# Altium PCB CMT4531_V1.0.pcbdoc
Units mil, origin at the board's own origin, x right, y up, seen from the top; angles counter-clockwise.
Board outline 629.9 x 984.3 mil, 2 copper layers (Top Layer, Bottom Layer), stack 12.8 mil thick; 28 components, 33 nets, 106 pads, 82 vias.
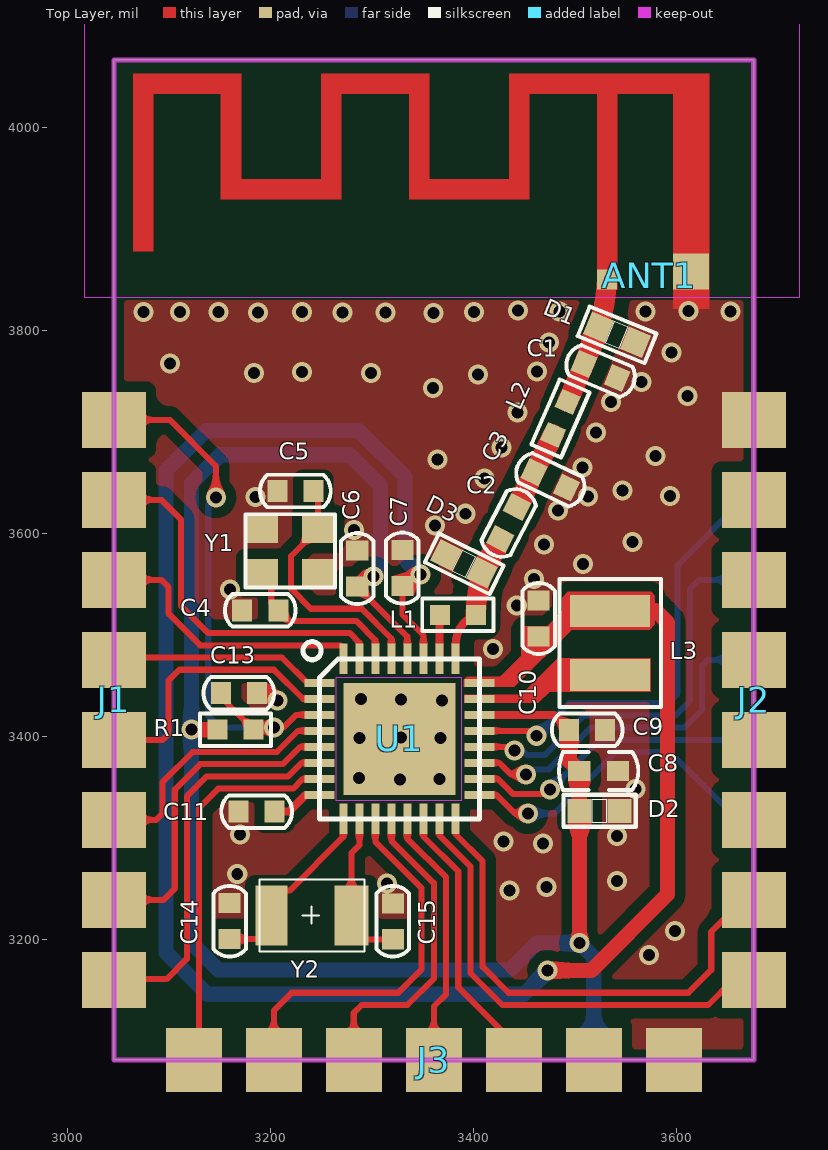
[diagram p0: Top Layer view]
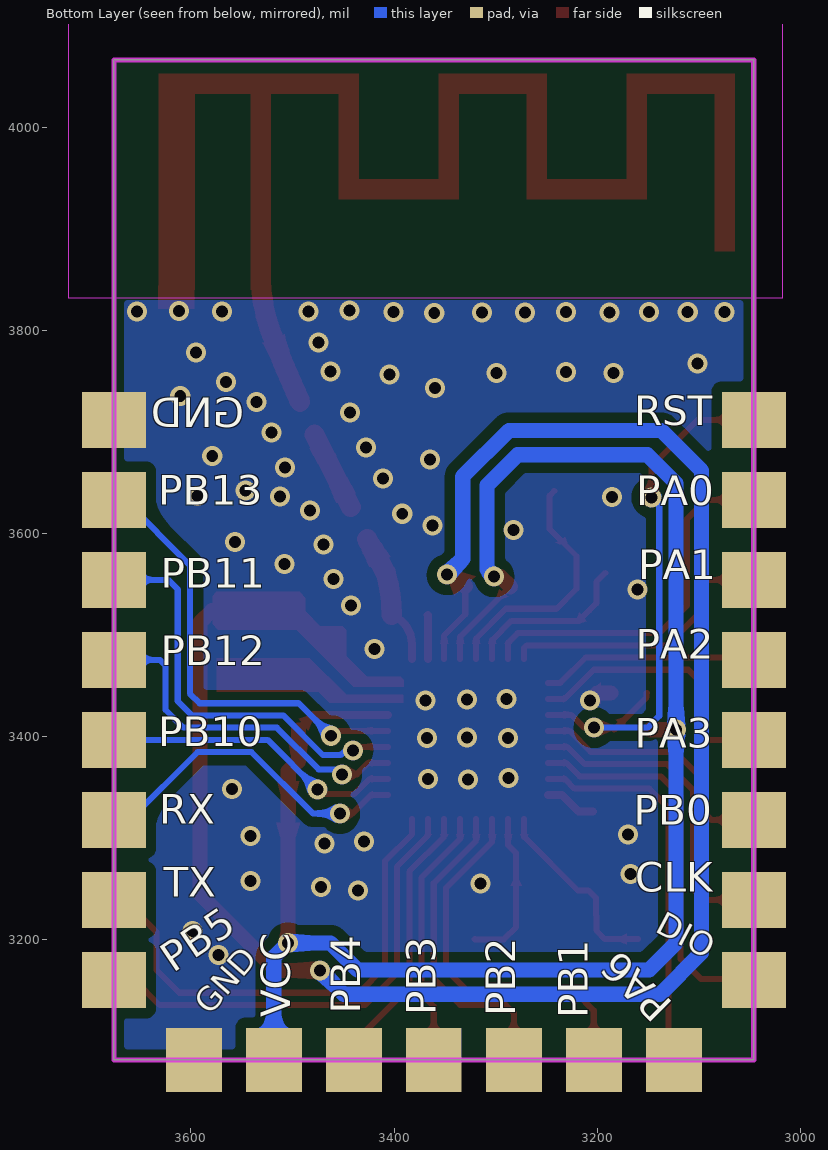
[diagram p1: Bottom Layer view, seen from below]

## Layer stack, top to bottom
Top Layer: signal copper 1.4
Dielectric1: surface 10, Dk 4.3
Bottom Layer: signal copper 1.4

## Board outline
3046,4066.3 3675.9,4066.3 3675.9,3082 3046,3082

## Design rules (kind name [scope] priority, off if disabled: settings)
BoardOutlineClearance default_1 [All] p1: gap=10 except(0: Arc-SplitContinuation Track-SplitContinuation SMDPad-SplitContinuation THPad-SplitContinuation Via-SplitContinuation Fill-SplitContinuation Poly-SplitContinuation Region-SplitContinuation Text-SplitContinuation)
BoardOutlineClearance default_3 [All] p2: gap=10 except(0: Arc-SplitContinuation Track-SplitContinuation SMDPad-SplitContinuation THPad-SplitContinuation Via-SplitContinuation Fill-SplitContinuation Poly-SplitContinuation Region-SplitContinuation Text-SplitContinuation)
Clearance default [All] p1: gap=7
Clearance default_2 [All] p2: gap=7
DiffPairsRouting differentialPair [All] p1: maxlimit=0 minlimit=5 mostfreqgap=6 toplayer_minwidth=5 toplayer_maxwidth=100 toplayer_prefwidth=100 bottomlayer_minwidth=5 bottomlayer_maxwidth=100 bottomlayer_prefwidth=100 maxuncoupledlength=10
PasteMaskExpansion pasteMaskExpansion [All] p1: expansion=0
PlaneConnect innerPlane [All] p1: planeconnectstyle=Relief reliefexpansion=20 reliefentries=4 reliefconductorwidth=10 reliefairgap=10
PolygonConnect copperRegion1 [All] p1: connectstyle=Direct reliefconductorwidth=10 reliefentries=4 polygonreliefangle="90 Angle" airgapwidth=10
RoutingVias viaSize [All] p1: holewidth=24 width=24 viastyle="Through Hole" minholewidth=19.7 minwidth=19.7 maxholewidth=393.7 maxwidth=393.7
SolderMaskExpansion solderMaskExpansion_1 [IsVia] p1: expansion=-1000 useseparateexpansions=TRUE expansionbottom=-1000
SolderMaskExpansion solderMaskExpansion [All] p2: expansion=2 useseparateexpansions=TRUE expansionbottom=2
Width default_4 [All] p1: maxlimit=6 minlimit=6 preferedwidth=6
27 further rules are at their usual default settings.

## Components (designator, comment, footprint, x,y, rotation, side; value= is the part's Value field where it differs from the comment)
ANT1 "ANT-1" AN043A 3531.5,3850 r0 top
C1 "CAPX" C0402X#1 3525.2,3760 r157 top
C2 "CAPX" C0402X#2 3434.6,3610.4 r242.6 top
C3 "CAPX" C0402X#3 3475.6,3652.9 r154.5 top
C4 "CAPX" C0402X#4 3190.1,3524.4 r0 top
C5 "CAPX" C0402X#4 3224.6,3641.9 r0 top
C6 "CAPX" C0402X#5 3285.6,3565.4 r270 top
C7 "CAPX" C0402X#5 3330.1,3565.9 r270 top
C8 "CAPX" C0402-Z 3523.2,3366.3 r180 top
C9 "CAPX" C0402X#5 3511.9,3406.7 r0 top
C10 "CAPX" C0402X#5 3464.1,3516.4 r270 top
C11 "CAPX" C0402X#4 3186.6,3326.4 r0 top
C13 "CAPX" C0402X#4 3169.1,3443 r180 top
C14 "CAPX" C0402X#5 3160,3218.5 r90 top
C15 "CAPX" C0402X#5 3320.6,3218.4 r90 top
D1 "TVS" R0402#1 3541.3,3795.7 r337.8 top
D2 "TVS" R0402#2 3524.1,3327.1 r0 top
D3 "TVS" R0402#3 3390.8,3570.2 r333.8 top
J1 "8PIN" 8PIN_2.0MM#1 3046,3711.9 r270 top
J2 "8PIN" 8PIN_2.0MM#2 3675.9,3160.7 r90 top
J3 "7PIN" 7PIN_2.0MM 3124.7,3082 r0 top
L1 "INDUCTOR" R0402X#1 3384.6,3519.9 r0 top
L2 "INDUCTOR" R0402X#2 3485.5,3713.3 r66.4 top
L3 "INDUCTOR" 2520A 3534.6,3492.4 r270 top
R1 "RESX" R0402X#3 3165.8,3407 r0 top
U1 "CMT4531" QFN32 3327.1,3397.9 r0 top
Y1 "KSX23" 2016-32M 3219.6,3582.9 r0 top
Y2 "XTAL1@CM8V-T1A" CM8V-T1A 3240.5,3224 r0 top

## Footprints (in the part's own frame and the unit in brackets; to place one, negate y for a bottom-side part, rotate by r counter-clockwise, add the part's x,y. Pads: shape width x height; smd on the part's side, far side on the other; paste and mask are expansions set on the pad)
7PIN_2.0MM [mil]
  rect 55.1x63 all layers, no hole: 1(0,0) 2(78.8,0) 3(157.5,0) 4(236.3,0) 5(315,0) 6(393.7,0) 7(472.5,0)
8PIN_2.0MM#1 [mil]
  rect 55.1x63 all layers, no hole: 1(0,0) 2(78.7,0) 3(157.5,0) 4(236.2,0) 5(314.9,0) 6(393.7,0) 7(472.4,0) 8(551.2,0)
8PIN_2.0MM#2 [mil]
  rect 55.1x63 all layers, no hole: 1(0,0) 2(78.8,0) 3(157.5,0) 4(236.3,0) 5(315,0) 6(393.7,0) 7(472.5,0) 8(551.2,0)
2016-32M [mil]
  rect 31.5x27.6 smd: 1(27.6,21.7) 2(-27.5,21.7) 3(-27.5,-21.6) 4(27.6,-21.6)
  silkscreen extent -44,-36 44,36
2520A [mil]
  rect 31.5x78.7 smd: 1(-31.5,0) 2(31.5,0)
  silkscreen extent -63,-50 63,50
AN043A [mil]
  rect 35.4x35.4 smd: 1(82.6,7.9)
  rect 19.7x19.7 smd: 2(0,0)
  Top Layer region: -466.6,183.1 -446.9,183.1 -446.9,28 -466.6,28
  Top Layer region: -360.3,183.1 -466.6,183.1 -466.6,202.8 -360.3,202.8
  Top Layer region: -380,183.1 -360.3,183.1 -360.3,79.1 -380,79.1
  Top Layer region: -281.5,79.1 -360.3,79.1 -360.3,98.8 -281.5,98.8
  Top Layer region: -281.5,183.1 -261.8,183.1 -261.8,79.1 -281.5,79.1
  Top Layer region: -175.2,183.1 -281.5,183.1 -281.5,202.8 -175.2,202.8
  Top Layer region: -194.9,183.1 -175.2,183.1 -175.2,79.1 -194.9,79.1
  Top Layer region: -96.5,79.1 -175.2,79.1 -175.2,98.8 -96.5,98.8
  Top Layer region: -96.5,183.1 -76.8,183.1 -76.8,79.1 -96.5,79.1
  Top Layer region: 100.4,183.1 -96.5,183.1 -96.5,202.8 100.4,202.8
  Top Layer region: 9.8,183.1 -9.9,183.1 -9.9,-9.8 9.8,-9.8
  Top Layer region: 64.9,-9.8 100.4,-9.8 100.4,183.1 64.9,183.1
C0402-Z [mil]
  rect 22x20 smd: 1(19,0) 2(-19,0)
  silkscreen extent -39,-19 39,19
C0402X#1 [mil]
  rect 21.7x19.7 smd rot 89.96: 1(-17.7,-0.02) 2(17.7,0.02)
  silkscreen extent -35,-16 35,16
C0402X#2 [mil]
  rect 21.7x19.7 smd rot 90.01: 1(-17.8,0.01) 2(17.67,0.03)
  silkscreen extent -35,-16 35,16
C0402X#3 [mil]
  rect 21.7x19.7 smd rot 90.05: 1(-17.71,-0.03) 2(17.71,0.03)
  silkscreen extent -35,-16 35,16
C0402X#4 [mil]
  rect 19.7x21.7 smd: 1(-17.7,0) 2(17.8,0)
  silkscreen extent -35,-16 35,16
C0402X#5 [mil]
  rect 19.7x21.7 smd: 1(-17.7,0) 2(17.7,0)
  silkscreen extent -35,-16 35,16
CM8V-T1A [mil]
  rect 31.5x59.1 smd paste+0 mask+2: 1(-39.4,0)
  rect 33.5x59.1 smd paste+0 mask+2: 2(39.4,0)
  silkscreen extent -51,-35 52,35
QFN32 [mil]
  rect 29.9x7.9 smd paste+0 mask+0: 1(-78.7,55.2) 2(-78.7,39.4) 3(-78.7,23.7) 4(-78.7,7.9) 5(-78.7,-7.8) 6(-78.7,-23.6) 7(-78.7,-39.3) 8(-78.7,-55.1) 17(78.8,-55.1) 18(78.8,-39.3) 19(78.8,-23.6) 20(78.8,-7.8) 21(78.8,7.9) 22(78.8,23.7) 23(78.8,39.4) 24(78.8,55.2)
  rect 7.9x29.9 smd paste+0 mask+0: 9(-55.1,-78.7) 10(-39.3,-78.7) 11(-23.6,-78.7) 12(-7.8,-78.7) 13(7.9,-78.7) 14(23.7,-78.7) 15(39.4,-78.7) 16(55.2,-78.7) 25(55.2,78.8) 26(39.4,78.8) 27(23.7,78.8) 28(7.9,78.8) 29(-7.8,78.8) 30(-23.6,78.8) 31(-39.3,78.8)
  rect 7.9x29.9 smd: 32(-55.1,78.8)
  rect 110.2x110.2 smd paste-2 mask-2: 33(0,0)
  silkscreen extent -95,-79 79,96
R0402#1 [mil]
  rect 23.6x23.6 smd rot 0.05 paste-2 mask+0: 1(-19.65,-0.03) 2(19.65,0.03)
  silkscreen extent -35,-16 36,16
R0402#2 [mil]
  rect 23.6x23.6 smd paste-2 mask+0: 1(-19.7,0) 2(19.7,0)
  silkscreen extent -36,-16 36,16
R0402#3 [mil]
  rect 23.6x23.6 smd rot 179.99 paste-2 mask+0: 1(-19.72,-0.01) 2(19.72,0.01)
  silkscreen extent -35,-16 36,16
R0402X#1 [mil]
  rect 19.7x19.7 smd: 1(-17.7,0) 2(17.8,0)
  silkscreen extent -35,-16 35,16
R0402X#2 [mil]
  rect 19.7x19.7 smd rot 0.01: 1(-17.69,0.02) 2(17.78,0.02)
  silkscreen extent -35,-16 35,16
R0402X#3 [mil]
  rect 19.7x19.7 smd: 1(-17.7,0) 2(17.7,0)
  silkscreen extent -35,-16 35,16

## Via types
v1: diameter 19.7, hole 11.8, Top Layer to Bottom Layer, 82 vias

## Nets (pads, with @x,y where several pads share a name; then routed paths per layer and width w, separated by ;. In a path a pad name is that pad's centre, name@x,y a point inside that pad or via, vN(x,y) a via of type N, cw(c..) or ccw(c..) an arc to the next point about the centre after c; other vN are vias at no path point)
$$$9803: C2.2 D3.2 L1.2 U1.25 | length 131.4
  Top Layer w8: U1.25 3382.3,3490.5 cw(c3413.9,3490.5) L1.2
  Top Layer w20: L1.2@3402.3,3519.98 cw(c3551.6,3519.2) D3.2@3408.37,3561.35 ; D3.2 C2.2
$$$9841: L1.1 U1.26 | length 43.4
  Top Layer w8: U1.26 3366.5,3519.5 L1.1
$$$10022: C2.1 C3.2 L2.1 | length 79.3
  Top Layer w20: C2.1 C3.2 L2.1
$$$10025: ANT1.2 C1.2 D1.1 L2.2 | length 127.4
  Top Layer w20: L2.2 C1.2 D1.1 ; D1.1@3522.95,3803.04 ccw(c3362.5,3856.1) ANT1.2@3531.39,3849.91
$$$11832: C11.2 U1.8 | length 50.8
  Top Layer w8: C11.2@3204.4,3326.5 3218.5,3326.5 3234.8,3342.8 U1.8
$$$13101: C14.1 U1.9 Y2.1 | length 190
  Top Layer w6: C14.1 3192.5,3200.8 3201,3209.3 3201,3223.9 Y2.1 3201.1,3241.1 3208.5,3248.5 3219,3248.5 3272,3301.5 U1.9
$$$13107: C15.1 U1.10 Y2.2 | length 155.7
  Top Layer w6: U1.10 3287.8,3293.3 3279.9,3285.4 Y2.2 3280,3223.9 3280,3212.5 3292,3200.5 3320.4,3200.5 C15.1
$$$17097: L3.2 U1.23
GND: ANT1.1 C1.1 C3.1 C4.1 C5.1 C6.1 C7.1 C8.2 C9.2 C10.1 C11.1 C13.1 C14.2 C15.2 D1.2 D2.2 D3.1 J2.8 J3.7 U1.33 Y1.2 Y1.4 | length 23.5
  Top Layer w15: C13.1 3200,3443 v1(3207,3435.5)
  other v1: 3573,3185 3598.5,3209 3435.5,3248.5 3472,3252 3315,3255.5 3541.5,3258 3167.5,3265 3468.5,3295 3429.5,3297 3541.5,3302.5 3170,3304 3559.5,3348.5 3327.5,3358 3366.5,3358.5 3287.5,3359.5 3288,3399 3367.5,3399 3328.5,3399.5 3328.5,3436.5 3369,3435.5 3289.5,3437 3419.4,3486.4 3442.6,3529 3160.5,3545 3459.5,3555.5 3508,3570 3469.5,3589 3556.5,3591.5 3282.5,3603.5 3362,3608 3392,3619.5 3483,3622.5 3185.5,3636 3512.5,3636.5 3593.5,3637 3546.5,3642.5 3411,3654 3507.5,3665 3364.5,3673 3579,3676.5 3427.5,3684.5 3520.5,3699.5 3443.5,3719 3535.5,3729.5 3610.5,3735.5 3360,3743.5 3565.5,3749 3404.5,3756.5 3184,3758 3299,3758 3231,3759 3462.5,3759.5 3101.5,3767.5 3595,3778 3474.5,3788 3360.5,3817 3075,3818 3111,3818 3149,3818 3188,3817.5 3231,3818 3271,3817.5 3313.5,3817.5 3400.5,3818 3484.5,3818.5 3569.5,3818.5 3653,3818.5 3611.5,3819 3444,3819.5
PA00: J1.2 U1.31 | length 365.8
  Top Layer w6: J1.2 3092.8,3633.2 3112,3614 3112,3529 3139,3502 3278.5,3502 3287.8,3492.7 U1.31
PA01: J1.3 U1.32 | length 279.7
  Top Layer w6: J1.3 3092.6,3554.4 3100,3547 3100,3521 3131,3490 3269.5,3490 3272,3487.5 U1.32
PA02: J1.4 U1.1 | length 215
  Top Layer w6: J1.4 3046,3478 3211.4,3478 3236.3,3453.1 U1.1
PA03: J1.5 U1.2 | length 273.6
  Top Layer w6: J1.5 3094,3397 3100,3403 3100,3455.5 3110.5,3466 3203.5,3466 3232.2,3437.3 U1.2
PA06: J3.1 U1.7 | length 383.7
  Top Layer w6: J3.1 3130,3082 3130,3330.2 3148.8,3349 3222.5,3349 3232.1,3358.6 U1.7
PB00: J1.6 U1.4 | length 256.8
  Top Layer w6: J1.6 3087.7,3318.2 3094,3324.5 3094,3355.5 3123.5,3385 3206.5,3385 3227.3,3405.8 U1.4
PB01: J3.2 U1.11 | length 377.8
  Top Layer w6: J3.2 3203.5,3130.5 3221,3148 3326,3148 3349,3171 3349,3251 3303.5,3296.5 U1.11
PB02: J3.3 U1.12 | length 313.5
  Top Layer w6: J3.3 3282.2,3128.2 3290,3136 3335,3136 3361,3162 3361,3256 3319.3,3297.7 U1.12
PB03: J3.4 U1.13 | length 257.9
  Top Layer w6: U1.13 3335,3299.5 3373,3261.5 3373,3146.5 3361,3134.5 J3.4
PB04: J3.5 U1.14 | length 274
  Top Layer w6: U1.14 3350.8,3301.7 3385,3267.5 3385,3153.5 3439.7,3098.8 J3.5
PB05: J2.1 U1.15 | length 466.5
  Top Layer w6: U1.15 3366.5,3303 3397,3272.5 3397,3167.5 3428.5,3136 3631,3136 3655.7,3160.7 J2.1
PB10: J2.4 U1.18 | length 298.4
  Top Layer w6: U1.18 3424,3358.6 3439.1,3343.5 3471,3343.5 v1(3475.5,3348)
  Bottom Layer w6: v1(3475.5,3348) 3524.5,3397 J2.4
PB11: J2.6 U1.20 | length 409
  Top Layer w6: U1.20 v1@3437,3390.1 ; v1@3437,3390 v1(3440.5,3386.5)
  Bottom Layer w6: v1(3440.5,3386.5) 3447.5,3386.5 3452.6,3382 3470,3382 3509,3421 3599,3421 3613,3435 3613,3545 3622.4,3554.4 J2.6
PB12: J2.5 U1.19 | length 346.8
  Top Layer w6: U1.19 3425.5,3374.3 3436.8,3363 v1(3451.5,3363)
  Bottom Layer w6: v1(3451.5,3363) 3456.3,3367.8 3474.3,3367.8 3515.5,3409 3607.5,3409 3625,3426.5 3625,3470 3630.7,3475.7 J2.5
PB13: J2.7 U1.21 | length 442.3
  Top Layer w6: U1.21 3457.2,3405.8 v1(3462,3401)
  Bottom Layer w6: v1(3462,3401) 3494,3433 3591.5,3433 3601,3442.5 3601,3569 3665.2,3633.2 J2.7
RESET: C13.2 J1.1 R1.2 U1.3 | length 557.9
  Top Layer w6: J1.1 3101.1,3711.9 3146.5,3666.5 v1(3146.5,3635.5) ; C13.2 3151.5,3442.8 3151.5,3439 R1.2 3185.6,3409 v1(3203.5,3409) 3213,3409 3225.6,3421.6 U1.3
  Bottom Layer w6: v1(3146.5,3635.5) 3139,3628 3139,3420.5 3150.5,3409 v1(3203.5,3409)
RXD: J2.3 U1.17 | length 330.3
  Top Layer w6: U1.17 3422.5,3342.8 3440.8,3324.5 v1(3453.5,3324.5)
  Bottom Layer w6: v1(3453.5,3324.5) 3480,3324.5 3540.5,3385 3593.4,3385 3660.4,3318.2 J2.3
SWCLK: J1.7 U1.5 | length 321.9
  Top Layer w6: J1.7 3095,3239.5 3106,3250.5 3106,3348 3131,3373 3212.5,3373 3229.6,3390.1 U1.5
SWDIO: J1.8 U1.6 | length 384.6
  Top Layer w6: J1.8 3046.6,3161.4 3097.9,3161.4 3118,3181.5 3118,3341.5 3137.5,3361 3217.5,3361 3230.8,3374.3 U1.6
TXD: J2.2 U1.16 | length 509
  Top Layer w6: U1.16 3382.3,3304.2 3409,3277.5 3409,3173.5 3434.5,3148 3611.5,3148 3634,3170.5 3634,3208 3675.9,3250 J2.2
VCC: C6.2 C8.1 C9.1 D2.1 J3.6 R1.1 U1.22 U1.28 | length 1730.1
  Top Layer w6: C6.2 3334.9,3498.5 3335,3498.5 U1.28
  Top Layer w8: U1.22@3405.9,3421.5 3479.4,3421.5 C9.1
  Top Layer w15: v1(3122.5,3407) R1.1@3148,3407 ; C6.2 3295.4,3557.5 v1(3301.5,3557.5) ; C9.1 3494.2,3376 3494.5,3376 C8.1 3504.2,3325.2 3504.4,3325 D2.1 3504.4,3207.1 v1(3504.5,3197)
  Bottom Layer w15: v1(3301.5,3557.5) 3308.5,3564.5 3308.5,3647.5 3278.5,3677.5 3150.5,3677.5 3122.5,3649.5 v1(3122.5,3407) 3122.5,3197 3149,3170.5 3436,3170.5 3462.5,3197 v1(3504.5,3197) 3518.7,3182.8 3518.4,3182.5 J3.6
VDCDC: C7.2 C10.2 L3.1 U1.24 U1.27 | length 1830.2
  Top Layer w6: C7.2 3330,3548.1 3330,3520.5 3350.8,3499.7 U1.27
  Top Layer w15: C7.2 3341.9,3559.5 v1(3348,3559.5) ; v1(3473,3170) 3516,3170 3591,3245 3591,3512.5 3579.5,3524 3534.7,3524 L3.1
  Bottom Layer w15: v1(3348,3559.5) 3332.5,3575 3332.5,3656 3287,3701.5 3137,3701.5 3097.5,3662 3097.5,3187.5 3138.5,3146.5 3449.5,3146.5 v1(3473,3170)
XI: C4.2 U1.30 Y1.3 | length 169.6
  Top Layer w6: Y1.3 3200.9,3552.5 3201,3552.5 3201,3531.3 C4.2 3218.3,3514 3284.5,3514 3303.5,3495 U1.30
XO: C5.2 U1.29 Y1.1 | length 248.5
  Top Layer w6: C5.2 3247,3637.3 3247,3604.8 Y1.1 3220.5,3577.9 3220.5,3545.5 3240,3526 3290,3526 3319.3,3496.7 U1.29

## Polygon pours and split planes (outlines as drawn)
GND on Bottom Layer "Bottom Layer-GND" (solid, remove dead copper, pour order 2): 3001.5,4194.6 3788,4194.6 3788,3004 3001.5,3004
GND on Top Layer "Top Layer-GND" (solid, remove dead copper, pour order 0): 3000,4231.5 3786.5,4231.5 3786.5,3000 3000,3000

## Keep-outs
Top Layer:
  region: 3265.1,3458.4 3388.1,3458.4 3388.1,3336.9 3265.1,3336.9
Board Outline Layer:
  region: 3017.5,4201 3720.5,4201 3720.5,3832 3017.5,3832
  lines w5: 3046,3082 3046,4066.3 3675.9,4066.3 3675.9,3082 3046,3082

## Other copper
Top Layer:
  region: 3596.5,3844 3596.5,3821.5 3632,3821.5 3632,3844
  region: 3391,3441.3 3391,3433.3 3463.7,3433.3 3474.9,3444.5 3574.5,3444.5 3574.5,3477.5 3483,3477.5 3446.8,3441.3
  region: 3390.5,3456 3390.5,3449 3440,3449 3496.5,3505.5 3573.5,3505.5 3578.5,3510.5 3578.5,3539 3575,3542.5 3493,3542.5 3487.5,3537 3487.5,3524 3472.5,3509 3450.5,3509 3447,3505.5 3447,3479.5 3426.5,3459 3393.5,3459

## Silkscreen, mask and mechanical layers (free items; w line width, h text height)
Bottom Silkscreen Layer:
  text "RST" at 3163.5,3697 h50
  text "GND" at 3547.5,3695 h50
  text "PA0" at 3161.5,3618 h50
  text "PB13" at 3632,3618.5 h50
  text "PA1" at 3159.5,3545 h50
  text "PB11" at 3629.5,3537 h50
  text "PA2" at 3162,3467 h50
  text "PB12" at 3629.5,3460.5 h50
  text "PB10" at 3632,3381 h50
  text "PA3" at 3163,3379.5 h50
  text "PB0" at 3164,3303.5 h50
  text "RX" at 3631,3304.5 h50
  text "CLK" at 3162.5,3237.5 h50
  text "TX" at 3626.5,3232.5 h50
  text "DIO" at 3148,3201.5 h40 r27.9
  text "PB5" at 3612,3159 h50 r326
  text "PA6" at 3117.5,3144 h50 r225
  text "PB4" at 3423.5,3127.5 h50 r270
  text "PB3" at 3349,3126 h50 r270
  text "PB2" at 3271,3125 h50 r270
  text "VCC" at 3492.5,3124 h50 r270
  text "PB1" at 3199.5,3123 h50 r270
  text "GND" at 3575.5,3120 h40 r311.1